# Altium PCB Platine_2_Intel_CPLD.PcbDoc (part 1 of 2)
Units mm, origin at the board's own origin, x right, y up, seen from the top; angles counter-clockwise.
Board outline 159.99 x 100 mm, 2 copper layers (Top Layer, Bottom Layer), stack 1.569 mm thick; 92 components, 117 nets, 463 pads, 99 vias.
Unrouted connection lines stored in the file: 4.
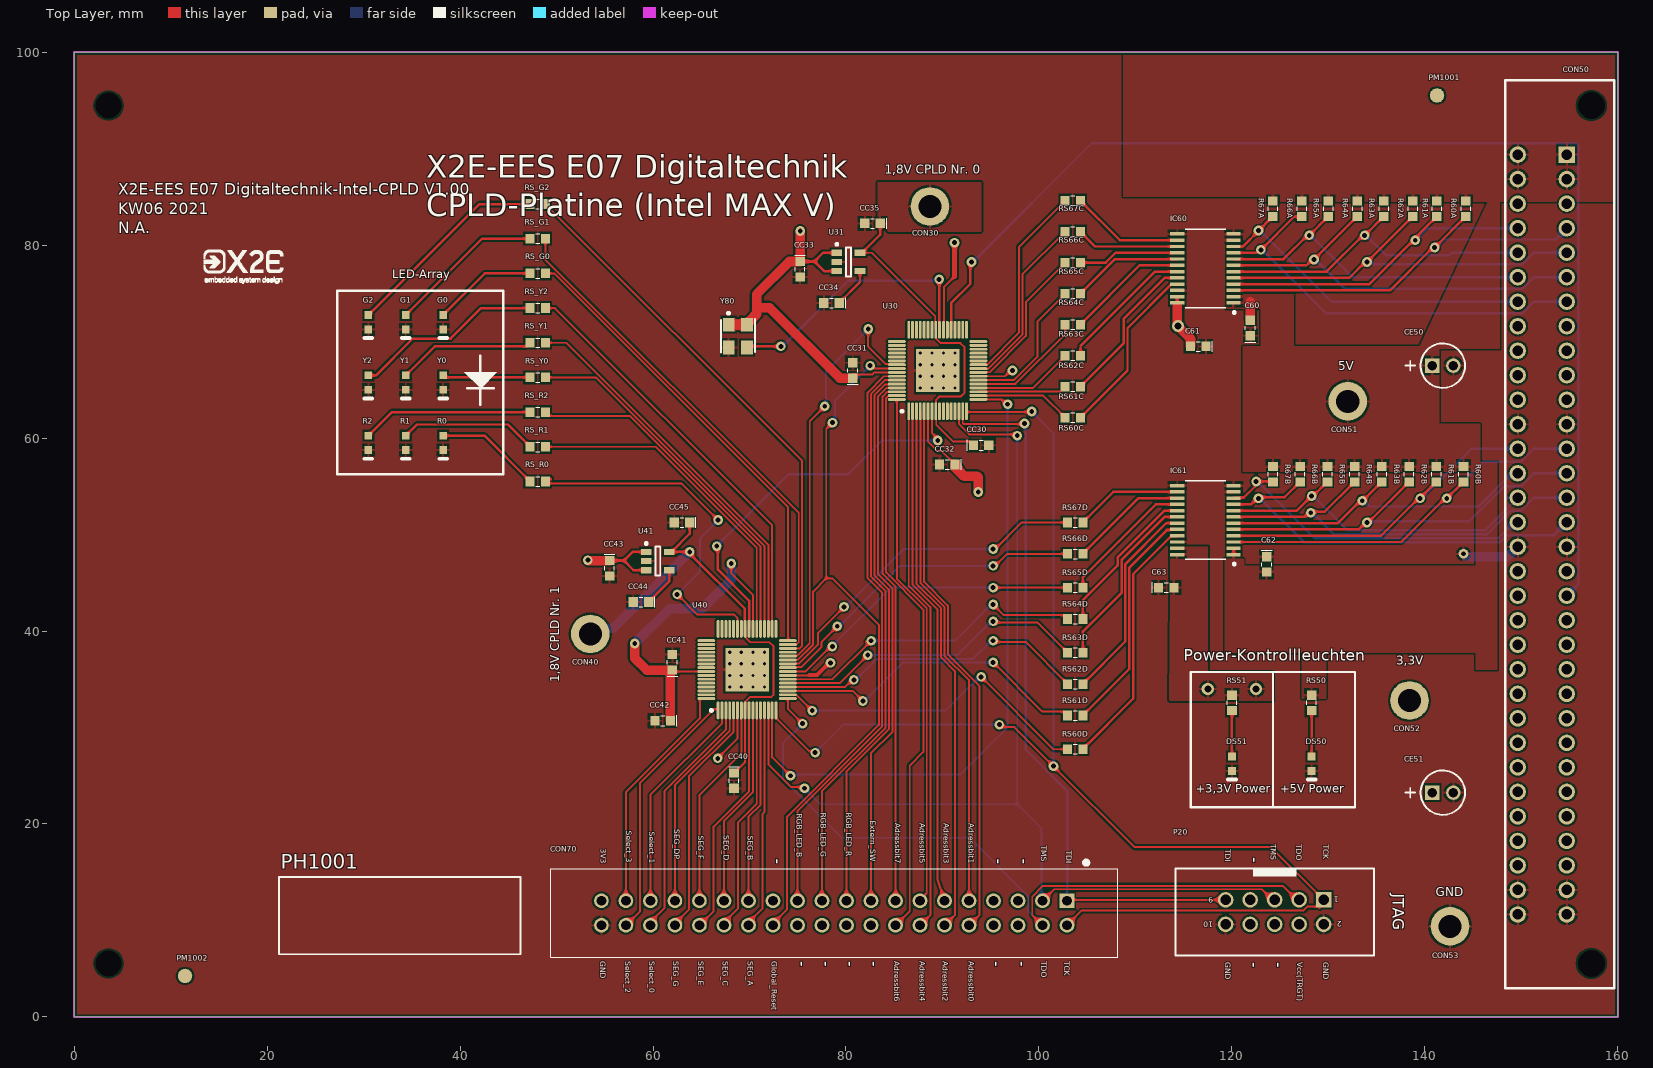
[diagram p0: Top Layer view]
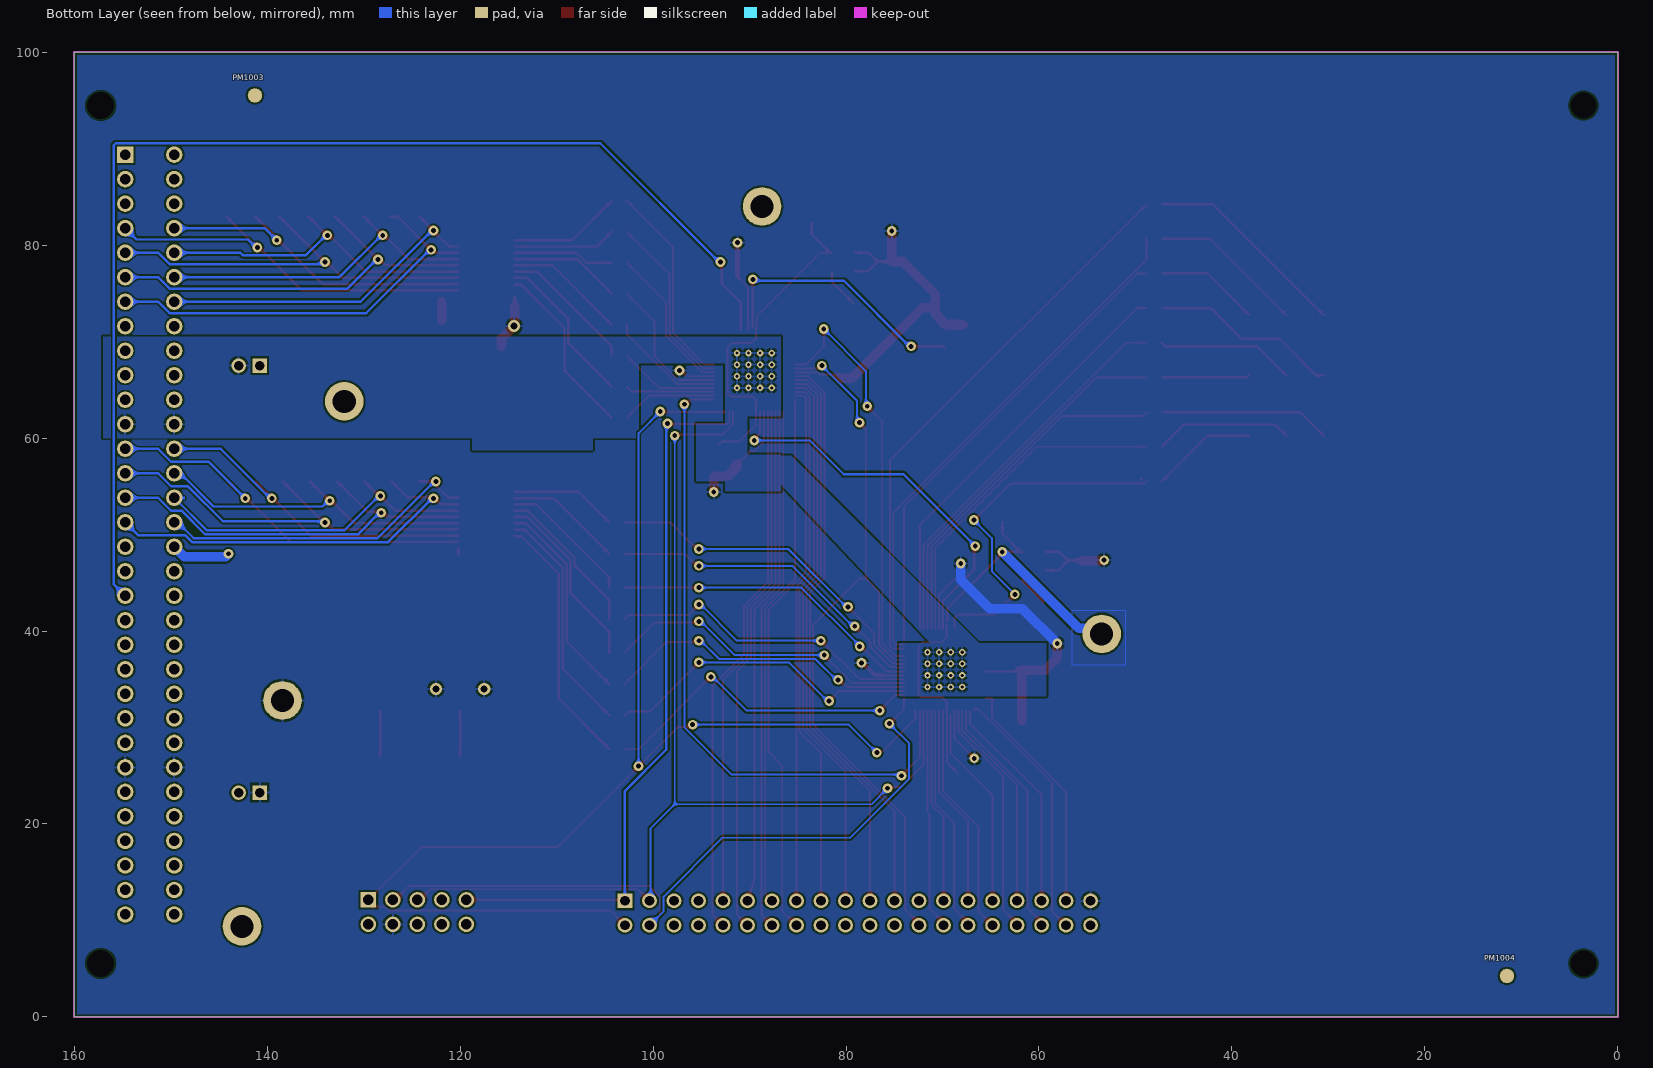
[diagram p1: Bottom Layer view, seen from below]

## Layer stack, top to bottom
Top Solder: solder mask 0.0254, SM-001, Dk 4
Top Layer: signal copper 0.035
Dielectric 1: core 1.4986, Core-043, Dk 4.3
Bottom Layer: signal copper 0.035
Bottom Solder: solder mask 0.0254, SM-001, Dk 4

## Board outline
0,0 159.995,0 159.995,100 0,100

## Design rules (kind name [scope] priority, off if disabled: settings)
Clearance [All] p1: gap=0.2 ignorepadtopadclearanceinfootprint=FALSE except(0: Arc-Hole Track-Hole SMDPad-Hole THPad-Hole Via-Hole Fill-Hole Poly-Hole Region-Hole Text-Hole; 0.1: Arc-SMDPad Track-SMDPad SMDPad-SMDPad; 0.15: Arc-Arc Arc-Track Track-Track)
FabricationTestPointUsage TestPointUsage [All] p1: valid=0 allowmultiple=FALSE
FabricationTestpoint Testpoint [All] p1: side=3 testpointundercomponent=TRUE minsize=1.016 maxsize=2.54 preferedsize=1.524 minholesize=0.508 maxholesize=1.016 preferedholesize=0.813 testpointgrid=0.025 allowsidetop=TRUE allowsidebottom=TRUE usegrid=TRUE gridtolerance=0
PlaneClearance [All] p1: clearance=0.5
PolygonConnect [All] p1: connectstyle=Relief reliefconductorwidth=0.254 reliefentries=4 polygonreliefangle="90 Angle" airgapwidth=0.254
RoomDefinition U_04-Intel_CPLD_1 [InComponentClass('U_04-Intel_CPLD_1')] p1: confinementstyle=ConfineIn formatcopy=TRUE lockcomponents=FALSE outline 53,24.5 76.75,24.5 76.75,54 53,54
RoomDefinition U_03-Intel_CPLD_0 [InComponentClass('U_03-Intel_CPLD_0')] p2: confinementstyle=ConfineIn formatcopy=TRUE lockcomponents=FALSE outline 72.75,55.5 96.5,55.5 96.5,85 72.75,85
RoutingVias [All] p1: holewidth=0.5 width=1 viastyle="Through Hole" minholewidth=0.5 minwidth=1 maxholewidth=0.5 maxwidth=1
SilkToSolderMaskClearance SilkscreenOverComponentPads [IsPad] p1: minsilkscreentomaskgap=0.254 clearancetoexposedcopper=TRUE
SolderMaskExpansion [All] p1: expansion=0.051 istentingtop=FALSE
Width [All] p1: maxlimit=1.5 minlimit=0.2 preferedwidth=0.254 minimp=50.000000 maximp=50.000000 favimp=50.000000
26 further rules are at their usual default settings.

## Classes and differential pairs
net class Data_MCU[7..0]: Data_MCU0 Data_MCU1 Data_MCU2 Data_MCU3 Data_MCU4 Data_MCU5 Data_MCU6 Data_MCU7
net class Data_5V_MCU[7..0]: Data_5V_MCU0 Data_5V_MCU1 Data_5V_MCU2 Data_5V_MCU3 Data_5V_MCU4 Data_5V_MCU5 Data_5V_MCU6 Data_5V_MCU7
net class Address_MCU[7..0]: Address_MCU0 Address_MCU1 Address_MCU2 Address_MCU3 Address_MCU4 Address_MCU5 Address_MCU6 Address_MCU7
net class Address_5V_MCU[7..0]: Address_5V_MCU0 Address_5V_MCU1 Address_5V_MCU2 Address_5V_MCU3 Address_5V_MCU4 Address_5V_MCU5 Address_5V_MCU6 Address_5V_MCU7
component class U_10-Mechanic: PH1001 PM1001 PM1002 PM1003 PM1004
component class U_09-Peripherials: G0 G1 G2 R0 R1 R2 RS_G0 RS_G1 RS_G2 RS_R0 RS_R1 RS_R2 RS_Y0 RS_Y1 RS_Y2 Y0 Y1 Y2
component class U_08-Clock: Y80
component class U_07-FPM_Connector: CON70
component class U_06-LevelShifter: C60 C61 C62 C63 IC60 IC61 R60A R60B R61A R61B R62A R62B R63A R63B R64A R64B R65A R65B R66A R66B R67A R67B RS60C RS60D RS61C RS61D RS62C RS62D RS63C RS63D RS64C RS64D RS65C RS65D RS66C RS66D RS67C RS67D x
component class U_05-Backplane_Connector: CE50 CE51 CON50 CON51 CON52 CON53 DS50 DS51 RS50 RS51
component class U_04-Intel_CPLD_1: CC40 CC41 CC42 CC43 CC44 CC45 CON40 U40 U41
component class U_03-Intel_CPLD_0: CC30 CC31 CC32 CC33 CC34 CC35 CON30 U30 U31
component class U_02-BlockChart: P20

## Components (designator, comment, footprint, x,y, rotation, side; value= is the part's Value field where it differs from the comment)
C60 "CC" 0603_C 121.9,71.4 r270 top
C61 "CC" 0603_C 116.5,69.5 r0 top
C62 "CC" 0603_C 123.6,46.9 r90 top
C63 "CC" 0603_C 113.2,44.5 r180 top
CC30 "CC" 0603_C 94,59.25 r180 top
CC31 "CC" 0603_C 80.7,67 r270 top
CC32 "CC" 0603_C 90.5,57.25 r0 top locked
CC33 "CC" 0603_C 75.25,77.5 r90 top locked
CC34 "CC" 0603_C 78.5,74 r0 top
CC35 "CC" 0603_C 82.75,82.25 r0 top locked
CC40 "CC" 0603_C 68.4,24.5 r90 top
CC41 "CC" 0603_C 62,36.75 r270 top
CC42 "CC" 0603_C 61,30.7 r0 top
CC43 "CC" 0603_C 55.5,46.5 r90 top
CC44 "CC" 0603_C 58.75,43 r0 top
CC45 "CC" 0603_C 63,51.25 r0 top
CE50 "22u0" CE_002_THT_2MM20_S_A 140.75,67.5 r0 top
CE51 "22u0" CE_002_THT_2MM20_S_A 140.75,23.25 r0 top
CON30 "CON_001_M_MM000_S_X_MILL-MAX_TP" CON_001_THT_MM000_S_D 88.7,84 r90 top
CON40 "CON_001_M_MM000_S_X_MILL-MAX_TP" CON_001_THT_MM000_S_D 53.5,39.7 r90 top
CON50 "103-40034" CON_064_THT_2MM54_M 160,50 r90 top locked
CON51 "CON_001_M_MM000_S_X_MILL-MAX_TP" CON_001_THT_MM000_S_D 132,63.8 r90 top
CON52 "CON_001_M_MM000_S_X_MILL-MAX_TP" CON_001_THT_MM000_S_D 138.4,32.8 r90 top
CON53 "CON_001_M_MM000_S_X_MILL-MAX_TP" CON_001_THT_MM000_S_D 142.6,9.4 r90 top
CON70 "CON_040_M_2MM54_S_A" CON_040_THT_2MM54_S_A 78.78,10.77 r180 top locked
DS50 "HSMG-C190" AVAG-HSMX-C190_V 128.25,26.25 r270 top
DS51 "HSMG-C190" AVAG-HSMX-C190_V 120,26.25 r270 top
G0 "HSMG-C190" AVAG-HSMX-C190_V 38.25,72 r270 top
G1 "HSMG-C190" AVAG-HSMX-C190_V 34.375,72 r270 top
G2 "HSMG-C190" AVAG-HSMX-C190_V 30.5,72 r270 top
IC60 "IC_74LVC4245APW118_TSSOP24" TSSOP24 117.25,77.575 r180 top
IC61 "IC_74LVC4245APW118_TSSOP24" TSSOP24 117.25,51.5 r180 top
P20 "CON_010_F_2MM54" CON_010_F_2MM54_Intel_Altera 124.42,10.997 r180 top
PH1001 "PH_25MM00_8MM00" PH_25MM00_8MM00_PCB 46.25,14.5 r180 top
PM1001 "PM_1MM50_MM000" PM_1MM50_PCB 141.25,95.5 r90 top
PM1002 "PM_1MM50_MM000" PM_1MM50_PCB 11.5,4.25 r90 top
PM1003 "PM_1MM50_MM000" PM_1MM50_PCB 141.25,95.5 r90 bottom
PM1004 "PM_1MM50_MM000" PM_1MM50_PCB 11.5,4.25 r90 bottom
R0 "HSMS-C190" AVAG-HSMX-C190_V 38.25,59.5 r270 top
R1 "HSMS-C190" AVAG-HSMX-C190_V 34.375,59.5 r270 top
R2 "HSMS-C190" AVAG-HSMX-C190_V 30.5,59.5 r270 top
R60A "RS" 0603_A 144.24,83.75 r90 top locked
R60B "RS" 0603_A 144,56.25 r90 top locked
R61A "RS" 0603_A 141.24,83.75 r90 top locked
R61B "RS" 0603_A 141.179,56.25 r90 top locked
R62A "RS" 0603_A 138.74,83.75 r90 top locked
R62B "RS" 0603_A 138.357,56.25 r90 top locked
R63A "RS" 0603_A 135.74,83.75 r90 top locked
R63B "RS" 0603_A 135.536,56.25 r90 top locked
R64A "RS" 0603_A 132.99,83.75 r90 top locked
R64B "RS" 0603_A 132.714,56.25 r90 top locked
R65A "RS" 0603_A 129.99,83.75 r90 top locked
R65B "RS" 0603_A 129.893,56.25 r90 top locked
R66A "RS" 0603_A 127.24,83.75 r90 top locked
R66B "RS" 0603_A 127.071,56.25 r90 top locked
R67A "RS" 0603_A 124.24,83.75 r90 top locked
R67B "RS" 0603_A 124.25,56.25 r90 top locked
RS50 "RS" 0603_A 128.25,32.55 r90 top
RS51 "RS" 0603_A 120,32.55 r90 top
RS60C "RS" 0603_A 103.5,62.107 r180 top
RS60D "RS" 0603_A 103.75,27.75 r180 top
RS61C "RS" 0603_A 103.5,65.321 r180 top
RS61D "RS" 0603_A 103.75,31.25 r180 top
RS62C "RS" 0603_A 103.5,68.536 r180 top
RS62D "RS" 0603_A 103.75,34.5 r180 top
RS63C "RS" 0603_A 103.5,71.75 r180 top
RS63D "RS" 0603_A 103.75,37.75 r180 top
RS64C "RS" 0603_A 103.5,74.964 r180 top
RS64D "RS" 0603_A 103.75,41.25 r180 top
RS65C "RS" 0603_A 103.5,78.179 r180 top
RS65D "RS" 0603_A 103.75,44.5 r180 top
RS66C "RS" 0603_A 103.5,81.393 r180 top
RS66D "RS" 0603_A 103.75,48 r180 top
RS67C "RS" 0603_A 103.5,84.607 r180 top
RS67D "RS" 0603_A 103.75,51.25 r180 top
RS_G0 "RS" 0603_A 48.05,77.062 r0 top locked
RS_G1 "RS" 0603_A 48.05,80.656 r0 top locked
RS_G2 "RS" 0603_A 48.05,84.25 r0 top locked
RS_R0 "RS" 0603_A 48.05,55.5 r0 top locked
RS_R1 "RS" 0603_A 48.05,59.094 r0 top locked
RS_R2 "RS" 0603_A 48.05,62.687 r0 top locked
RS_Y0 "RS" 0603_A 48.05,66.281 r0 top locked
RS_Y1 "RS" 0603_A 48.05,69.875 r0 top locked
RS_Y2 "RS" 0603_A 48.05,73.469 r0 top locked
U30 "5M80ZE64I5N" EQFP64_A-120_D2-45_M 89.5,67 r90 top locked
U31 "LP2992AIM5-1.8/NOPB" MF05A_N 80.25,78.25 r0 top locked
U40 "5M80ZE64I5N" EQFP64_A-120_D2-45_M 69.75,36 r90 top
U41 "LP2992AIM5-1.8/NOPB" MF05A_N 60.5,47.25 r0 top
Y0 "HSMY-C190" AVAG-HSMX-C190_V 38.25,65.75 r270 top
Y1 "HSMY-C190" AVAG-HSMX-C190_V 34.375,65.75 r270 top
Y2 "HSMY-C190" AVAG-HSMX-C190_V 30.5,65.75 r270 top
Y80 "ASE-4.000MHZ-LC-T" ASE-4.000MHZ-LC-T_HandSoldering 68.823,70.548 r270 top

## Footprints (in the part's own frame and the unit in brackets; to place one, negate y for a bottom-side part, rotate by r counter-clockwise, add the part's x,y. Pads: shape width x height; smd on the part's side, far side on the other; paste and mask are expansions set on the pad)
0603_A [mm]
  rect 0.95x1 smd mask+0.05: 1(-0.8,0) 2(0.8,0)
  silkscreen extent -0.2,-0.49 0.21,0.49, body extent -0.89,-0.49 0.89,0.49, height 0.45
0603_C [mm]
  rect 0.95x1 smd mask+0.05: 1(-0.8,0) 2(0.8,0)
  silkscreen extent -0.2,-0.55 1.45,0.55, body extent -0.89,-0.49 0.89,0.49, height 0.8
ASE-4.000MHZ-LC-T_HandSoldering [mm]
  rect 1.427x1.227 smd paste+0 mask+0: 1(-1.202,-0.977) 2(1.152,-0.977) 3(1.152,0.927) 4(-1.202,0.927)
  silkscreen extent -2.5,-1.78 1.69,1.72, body extent -1.83,-1.5 1.77,1.45, height 0.25
AVAG-HSMX-C190_V [mm] "SMD, 2-Leads, Body 1.6x0.8mm, Height 0.9mm"
  rect 0.8x0.8 smd: 1(-0.75,0) 2(0.75,0)
  silkscreen extent 1.65,-0.4 1.65,0.4, body extent -0.8,-0.4 0.8,0.4, height 0.9
CE_002_THT_2MM20_S_A [mm]
  rect 1.5x1.5 hole 1: 1(0,0)
  round 1.5 hole 1: 2(2.2,0)
  silkscreen extent -2.78,-2.3 3.4,2.3, body extent -1.4,-2.5 3.6,2.5, height 11
CON_001_THT_MM000_S_D [mm]
  round 4 hole 2.39: 1(0,0)
  body extent -1.58,-1.59 1.59,1.59, height 5.98
CON_010_F_2MM54_Intel_Altera [mm]
  rect 1.6x1.6 hole 1.1: 1(-5.08,-1.143)
  round 1.6 hole 1.1: 2(-5.08,1.397) 3(-2.54,-1.143) 4(-2.54,1.397) 5(0,-1.143) 6(0,1.397) 7(2.54,-1.143) 8(2.54,1.397) 9(5.08,-1.143) 10(5.08,1.397)
  silkscreen extent -10.28,-4.37 10.28,4.63, body extent -10.18,-4.3 10.18,4.88, height 9.13
CON_040_THT_2MM54_S_A [mm] "CONN HEADER VERT 40POS 2.54MM"
  rect 1.53x1.53 hole 1.02: 1(-24.13,-1.27)
  round 1.53 hole 1.02: 2(-24.13,1.27) 3(-21.59,-1.27) 4(-21.59,1.27) 5(-19.05,-1.27) 6(-19.05,1.27) 7(-16.51,-1.27) 8(-16.51,1.27) 9(-13.97,-1.27) 10(-13.97,1.27) 11(-11.43,-1.27) 12(-11.43,1.27) 13(-8.89,-1.27) 14(-8.89,1.27) 15(-6.35,-1.27) 16(-6.35,1.27) 17(-3.81,-1.27) 18(-3.81,1.27) 19(-1.27,-1.27) 20(-1.27,1.27) 21(1.27,-1.27) 22(1.27,1.27) 23(3.81,-1.27) 24(3.81,1.27) 25(6.35,-1.27) 26(6.35,1.27) 27(8.89,-1.27) 28(8.89,1.27) 29(11.43,-1.27) 30(11.43,1.27) 31(13.97,-1.27) 32(13.97,1.27) 33(16.51,-1.27) 34(16.51,1.27) 35(19.05,-1.27) 36(19.05,1.27) 37(21.59,-1.27) 38(21.59,1.27) 39(24.13,-1.27) 40(24.13,1.27)
  silkscreen extent -29.4,-5.52 29.4,4.6, body extent -29.23,-4.4 29.23,4.65, height 8.85
CON_064_THT_2MM54_M [mm]
  oval 0x1.524 hole 2.8 unplated paste+0 mask+0: 34(44.45,2.76) 35(-44.45,2.76)
  rect 1.7x1.7 hole 1.1: A1(39.37,5.3)
  round 1.7 hole 1.1: A2(36.83,5.3) A3(34.29,5.3) A4(31.75,5.3) A5(29.21,5.3) A6(26.67,5.3) A7(24.13,5.3) A8(21.59,5.3) A9(19.05,5.3) A10(16.51,5.3) A11(13.97,5.3) A12(11.43,5.3) A13(8.89,5.3) A14(6.35,5.3) A15(3.81,5.3) A16(1.27,5.3) A17(-1.27,5.3) A18(-3.81,5.3) A19(-6.35,5.3) A20(-8.89,5.3) A21(-11.43,5.3) A22(-13.97,5.3) A23(-16.51,5.3) A24(-19.05,5.3) A25(-21.59,5.3) A26(-24.13,5.3) A27(-26.67,5.3) A28(-29.21,5.3) A29(-31.75,5.3) A30(-34.29,5.3) A31(-36.83,5.3) A32(-39.37,5.3) C1(39.37,10.38) C2(36.83,10.38) C3(34.29,10.38) C4(31.75,10.38) C5(29.21,10.38) C6(26.67,10.38) C7(24.13,10.38) C8(21.59,10.38) C9(19.05,10.38) C10(16.51,10.38) C11(13.97,10.38) C12(11.43,10.38) C13(8.89,10.38) C14(6.35,10.38) C15(3.81,10.38) C16(1.27,10.38) C17(-1.27,10.38) C18(-3.81,10.38) C19(-6.35,10.38) C20(-8.89,10.38) C21(-11.43,10.38) C22(-13.97,10.38) C23(-16.51,10.38) C24(-19.05,10.38) C25(-21.59,10.38) C26(-24.13,10.38) C27(-26.67,10.38) C28(-29.21,10.38) C29(-31.75,10.38) C30(-34.29,10.38) C31(-36.83,10.38) C32(-39.37,10.38)
  body extent -47,-7.34 47,10.69, height 5.45
EQFP64_A-120_D2-45_M [mm] "Thin QFP, 64-Leads, Body 7x7mm, Pitch 0.4mm, Thermal Pad, IPC Low Density"
  oval 1.85x0.3 smd: 1(-4.225,3) 2(-4.225,2.6) 3(-4.225,2.2) 4(-4.225,1.8) 5(-4.225,1.4) 6(-4.225,1) 7(-4.225,0.6) 8(-4.225,0.2) 9(-4.225,-0.2) 10(-4.225,-0.6) 11(-4.225,-1) 12(-4.225,-1.4) 13(-4.225,-1.8) 14(-4.225,-2.2) 15(-4.225,-2.6) 16(-4.225,-3) 33(4.225,-3) 34(4.225,-2.6) 35(4.225,-2.2) 36(4.225,-1.8) 37(4.225,-1.4) 38(4.225,-1) 39(4.225,-0.6) 40(4.225,-0.2) 41(4.225,0.2) 42(4.225,0.6) 43(4.225,1) 44(4.225,1.4) 45(4.225,1.8) 46(4.225,2.2) 47(4.225,2.6) 48(4.225,3)
  oval 0.3x1.85 smd: 17(-3,-4.225) 18(-2.6,-4.225) 19(-2.2,-4.225) 20(-1.8,-4.225) 21(-1.4,-4.225) 22(-1,-4.225) 23(-0.6,-4.225) 24(-0.2,-4.225) 25(0.2,-4.225) 26(0.6,-4.225) 27(1,-4.225) 28(1.4,-4.225) 29(1.8,-4.225) 30(2.2,-4.225) 31(2.6,-4.225) 32(3,-4.225) 49(3,4.225) 50(2.6,4.225) 51(2.2,4.225) 52(1.8,4.225) 53(1.4,4.225) 54(1,4.225) 55(0.6,4.225) 56(0.2,4.225) 57(-0.2,4.225) 58(-0.6,4.225) 59(-1,4.225) 60(-1.4,4.225) 61(-1.8,4.225) 62(-2.2,4.225) 63(-2.6,4.225) 64(-3,4.225)
  rect 4.5x4.5 smd: 65(0,0)
  silkscreen extent -4.35,3.57 -4.1,3.82, body extent -3.5,-3.5 3.5,3.5, height 1.2
MF05A_N [mm] "SOT23, 5-Leads, Body 2.9x1.6mm, Pitch 0.95mm, Lead Span 2.8mm, IPC Medium Density"
  rect 1.1x0.65 smd: 1(-1.2,0.95) 2(-1.2,0) 3(-1.2,-0.95) 4(1.2,-0.95) 5(1.2,0.95)
  silkscreen extent -1.32,-1.5 0.25,1.95, body extent -0.83,-1.49 0.83,1.5, height 1.19
PH_25MM00_8MM00_PCB [mm]
  silkscreen extent 0,0 25,8
PM_1MM50_PCB [mm]
  round 1.5 smd mask+0.1: 1(0,0)
TSSOP24 [mm] "Level Shifter"
  rect 1.462x0.355 smd paste+0 mask+0: 1(-2.921,3.575) 2(-2.921,2.925) 3(-2.921,2.275) 4(-2.921,1.625) 5(-2.921,0.975) 6(-2.921,0.325) 7(-2.921,-0.325) 8(-2.921,-0.975) 9(-2.921,-1.625) 10(-2.921,-2.275) 11(-2.921,-2.925) 12(-2.921,-3.575) 13(2.921,-3.575) 14(2.921,-2.925) 15(2.921,-2.275) 16(2.921,-1.625) 17(2.921,-0.975) 18(2.921,-0.325) 19(2.921,0.325) 20(2.921,0.975) 21(2.921,1.625) 22(2.921,2.275) 23(2.921,2.925) 24(2.921,3.575)
  silkscreen extent -3.11,-4.08 2.12,4.7, body extent -3.3,-3.95 3.3,3.95, height 1.09

## Part data
C60 C61 C62 C63: library part X_00004988, capacitance=100N, manufacturer=Kemet, max_operating_temp=125C, min_operating_temp=-55C, package=0603, temp_coefficient=X7R, tolerance=10P0, voltage_rated=50V0, entity_name=CC_0603_100N_50V0_10P0_X7R_Kemet, entity_type_name=capacitor_ceramic, height=mm800, length=1mm60, ordering_information_btm=801-5347, production_status=Aktiv, release=blocked, series=none, used_in_bom=0, width=mm800, x2e_number=X_00004988
CC30 CC31 CC32 CC40 CC41 CC42: library part X_00000681, capacitance=100N, manufacturer=Yageo, max_operating_temp=125C, min_operating_temp=-55C, package=0603, temp_coefficient=X7R, tolerance=10P0, voltage_rated=50V0, entity_name=CC_0603_100N_50V0_10P0_X7R, entity_type_name=capacitor_ceramic, height=mm900, length=1mm60, ordering_information_btm=311-1344-6-ND, production_status=Aktiv, release=blocked, series=none, used_in_bom=1, width=mm800, x2e_number=X_00000681
CC33 CC43: library part X_00001611, capacitance=1U00, manufacturer="Taiyo Yuden", max_operating_temp=125C, min_operating_temp=-55C, package=0603, temp_coefficient=X7R, tolerance=10P0, voltage_rated=50V0, entity_name=CC_0603_1U00_50V0_10P0_X7R, entity_type_name=capacitor_ceramic, height=mm800, length=1mm60, ordering_information_btm=587-3247-6-ND, production_status=Aktiv, release=blocked, series=M, used_in_bom=1, width=mm800, x2e_number=X_00001611
CC34 CC44: library part X_00000431, capacitance=10N0, manufacturer=Kemet, max_operating_temp=125C, min_operating_temp=-55C, package=0603, temp_coefficient=X7R, tolerance=10P0, voltage_rated=50V0, entity_name=CC_0603_10N0_50V0_10P0_X7R, entity_type_name=capacitor_ceramic, height=mm800, length=1mm60, ordering_information_btm=399-1091-6-ND, production_status=Aktiv, release=blocked, series=none, used_in_bom=1, width=mm800, x2e_number=X_00000431
CC35 CC45: library part X_00002029, capacitance=4U70, manufacturer=Samsung, max_operating_temp=125C, min_operating_temp=-55C, package=0603, temp_coefficient=X7R, tolerance=10P0, voltage_rated=6V30, entity_name=CC_0603_4U70_6V30_10P0_X7R, entity_type_name=capacitor_ceramic, height=mm800, length=1mm60, ordering_information_btm=1276-2087-6-ND, production_status=Aktiv, release=blocked, series=CL, used_in_bom=1, width=mm800, x2e_number=X_00002029
CE50 CE51: library part CE_RADIAL_22U_50V0_20PO_R07, "Teapo Elko TA Series 22µF 50V"
CON30 CON40 CON51 CON52 CON53: library part X_00001838, "MILL-MAX_TP", manufacturer=MILL-MAX, max_operating_temp=0C, package=THT, editor_date="boos, 06.02.2014", entity_name=CON_001_M_MM000_S_X_MILL-MAX_TP, entity_type_name=connector, gender=M, grid=MM000, height=5mm56, length=3mm18, min_operating_temp=0C, mounting_type=S, number_of_electronic_pins=001, ordering_information="digikey, ED90581-ND", ordering_information_btm=ED90581-ND, pin_count_type=X, production_status=Aktiv, release=blocked, series=2501, shell_material=Tin, used_in_bom=1, width=3mm18, x2e_number=X_00001838
CON50: library part CON_064_M_2MM54_L_X, "C- Male Connector According to IEC 60603-2 (DIN 41612)", editor_date=li_08.12.2020
CON70: library part X_00006869, "Connector Header Through Hole 40 position 2.54mm", manufacturer="On Shore Technology Inc.", manufacturer_partnumber=302-S401, max_operating_temp=105C, min_operating_temp=-40C, package=THT, editor_date=niemiec_14.05.2020, entity_name="CON_040_M_2MM54_S_A_CON HEADER 40 POS", entity_type_name=connector, features="Connector Header Through Hole 40 position 0.100\" (2.54mm)", gender=M, grid=2MM54, height=8mm80, length=58mm4, mounting_type=S, number_of_electronic_pins=040, ordering_information_btm=ED10529-ND, Parameter 3="Digi-Key ED10529-ND", pin_count_type=A, production_status=Aktiv, release=blocked, series=302, shell_material="Polyester, Glass Filled", used_in_bom=0, width=9mm05, x2e_number=X_00006869
DS50 DS51 G0 G1 G2: library part CMP-1744-00002-1, "Chip LED, Green, 2.2 V, -40 to 85 degC, 2-Pin SMD, RoHS, Tape and Reel", Case\Package=SOIC, Clock Frequency="100 KHz", Frequency="400 KHz", Max Operating Temperature="85 degC", Max Supply Voltage="5.5 V", Min Operating Temperature="-40 degC", Min Supply Voltage="1.7 V", Nominal Supply Current="2 mA", Package Quantity=3000, Access Time="3500 ns", ComponentLink1Description="Manufacturer URL", ComponentLink1URL=http://www.avagotech.com/, ComponentLink2Description=Datasheet, ComponentLink2URL=http://docs.avagotech.com/docs/AV02-0551EN, ComponentLink3Description="Package Specification", ComponentLink3URL=http://www.fairchildsemi.com/dwg/MA/MA03D.pdf, DatasheetVersion=Mar-12, Density="32 kb", height="1.5 mm", Interface=Serial, length="5 mm", Max Clock Frequency="100 KHz", mount="Surface Mount", PackageDescription="2-Pin Surface Mount Device, Body 1.6 x 0.8 mm, Height 0.9 mm", PackageReference=HSMX-C190, Packaging="Tape and Reel", Pins=8, Radiation Hardening=No, REACH SVHC="No SVHC", RoHSCompliant=true, width="4 mm"
IC60 IC61: "ic, logic, bus switch, level shifter", manufacture_name=IDTQS3384QG8, manufacturer=IDT, max_operating_temp=85C, min_operating_temp=-40C, package=SSOP24, data_rate=bps000, entity_name=74LVC4245APW,118, entity_type_name=levelshifter, height=1mm73, input_type=logic, length=8mm89, number_of_bits=010, number_of_channels=001, ordering_information="digikey, 800-1739-1-ND", ordering_information_btm=800-1739-2-ND, output_type=logic, production_status=Aktiv, propagation_delay=250P, release=blocked, revision=none, series=none, used_in_bom=1, vcc_max=5V25, vcc_min=4V75, width=3mm90, x2e_number=X_00000794
P20: "Male Box Header WR-BHD, THT, Vertical, pitch 2.54 mm, 10 pins"
PH1001: "Tag", dimension_a=25MM0, dimension_b=8MM00, editor_date=lavan,23.01.2013, footprint_path=Y:\lib\pads_stable, footprint_ref=PH_25MM00_8MM00_PCB, library_path=Y:\lib\pads_stable\mechanic, library_ref=PH_25MM00_8MM00
PM1001 PM1002 PM1003 PM1004: "passer mark", dimension_a=1MM50, dimension_b=MM000, editor_date=lavan,14.01.2013, footprint_path=Y:\lib\pads_stable, footprint_ref=PM_1MM50_PCB, library_path=Y:\lib\pads_stable\mechanic, library_ref=PM_1MM50_MM000
R0 R1 R2: library part CMP-2000-06427-1, "LED Uni-Color Red, 52 mW, 20 mA, -40 to 85 degC, 2-Pin SMD, RoHS, Tape and Reel", Emitting Color=Red, Forward Current=25mA, Forward Voltage=2.6V, manufacturer=Avago, Operating Temp Range=-40Cto85C, Operating Temperature Classification=Industrial, Package Description="2-Pin Surface Mount Device, Body 1.6 x 0.8 mm, Height 0.9 mm", Package Reference=HSMX-C190, Package Type=ChipLed, Power Dissipation=52W, Reverse Voltage=5V, Test Current (It)=20mA, Chip Material=GaP, Datasheet URL=http://docs.avagotech.com/docs/AV02-0551EN, Datasheet Version=03/2012, DELETED=Compliant, Dominant Wave Length=626nm, High Brightness=No, Lens Dimensions=1x0.8x0.5mm, Lens Type=ColorlessDiffused, Lum Intensity=10mcd, Luminous Intensity=10mcd, Main Category=ChipLED, Manufacturer URL=http://www.avagotech.com/, Mounting=SurfaceMount, Mounting Technology=SurfaceMount, Number of  Elements=1, Packaging=TapeandReel, Peak Wavelength=630nm, Pin Count=2, Product Depth (mm)=0.8mm, Product Height (mm)=0.8mm, Product Length (mm)=1.6mm, Rad Hardened=No, Shape Type=Rectangular, Type=Uni-Color, Viewing Angle=170deg
R60A R60B R61A R61B R62A R62B R63A R63B R64A R64B R65A R65B R66A R66B R67A R67B: library part X_00000001, manufacturer=Yageo, max_operating_temp=125C, min_operating_temp=-55C, package=0603, power=W100, resistance=10K0, temp_coefficient=100PPM, tolerance=1P00, entity_name=RS_0603_10K0_W100_1P00_100PPM, entity_type_name=resistor_standard, height=mm450, length=1mm60, ordering_information_btm=311-10.0KHRCT-ND, production_status=Aktiv, release=blocked, series=RC0603, used_in_bom=1, width=mm800, x2e_number=X_00000001
RS50: library part X_00000390, manufacturer=Yageo, max_operating_temp=125C, min_operating_temp=-55C, package=0603, power=W100, resistance=1K15, temp_coefficient=100PPM, tolerance=1P00, entity_name=RS_0603_1K15_W100_1P00_100PPM, entity_type_name=resistor_standard, height=mm450, length=1mm60, ordering_information_btm=541-1.15KHCT-ND, production_status=Aktiv, release=blocked, series=RC0603, used_in_bom=1, width=mm800, x2e_number=X_00000390
RS51 RS_G0 RS_G1 RS_G2 RS_R0 RS_R1 RS_R2 RS_Y0 RS_Y1 RS_Y2: library part X_00000061, manufacturer=Yageo, max_operating_temp=125C, min_operating_temp=-55C, package=0603, power=W100, resistance=470R, temp_coefficient=100PPM, tolerance=1P00, entity_name=RS_0603_470R_W100_1P00_100PPM, entity_type_name=resistor_standard, height=mm450, length=1mm60, ordering_information_btm=311-470HRDKR-ND, production_status=Aktiv, release=blocked, series=RC0603, used_in_bom=1, width=mm800, x2e_number=X_00000061
RS60C RS60D RS61C RS61D RS62C RS62D RS63C RS63D RS64C RS64D RS65C RS65D RS66C RS66D RS67C RS67D: library part X_00000034, manufacturer=Yageo, max_operating_temp=125C, min_operating_temp=-55C, package=0603, power=W100, resistance=1K00, temp_coefficient=100PPM, tolerance=1P00, entity_name=RS_0603_1K00_W100_1P00_100PPM, entity_type_name=resistor_standard, height=mm450, length=1mm60, ordering_information_btm=504-8928, production_status=Aktiv, release=blocked, series=RC0603, used_in_bom=1, width=mm800, x2e_number=X_00000034
U30 U40: library part CMP-0217-00123-1, "MAX V 1.8V CPLD, 54 IOs, 80 Logic Elements, 64-Pin EQFP, Industrial Temperature, Speed Grade 5, Pb-Free", Code_JEDEC=MS-026-ABD-HD, ComponentLink1Description="Manufacturer URL", ComponentLink1URL=http://www.altera.com/, ComponentLink2Description=Datasheet, ComponentLink2URL=http://www.altera.com/literature/hb/max-v/max5_handbook.pdf, ComponentLink3Description="MAX V Device Pin-Out files", ComponentLink3URL=http://www.altera.com/literature/lit-dp.jsp?category=MAX%205&showspreadsheet=y, ComponentLink4Description="Package Specification", ComponentLink4URL=http://www.altera.com/devicepackaging/04R00384-01.pdf, DatasheetVersion="ver1.2, May-2011", PackageDescription="64-Pin Plastic Enhanced Quad Flat (EQFP) - Wire Bond - A:1.20 - D2:4.5", PackageReference=EQFP64_A-120_D2-45, PackageVersion="ver1.0, Jul-2011"
U31 U41: library part CMP-0062-02117-2, "Micropower 250 mA Low-Noise Ultra Low-Dropout Regulator, 5-pin SOT-23, Pb-Free", manufacturer="National Semiconductor", PackageTopMarking=LFCA*XTT, PowerWise=N, ComponentLink1Description="LP2992 Datasheet", ComponentLink1URL=http://www.national.com/ds/LP/LP2992.pdf, ComponentLink2Description="LP2992 Web Page", ComponentLink2URL=http://www.national.com/pf/LP/LP2992.html, ComponentLink3Description="MF05A Package Page", ComponentLink3URL=http://www.national.com/packaging/folders/mf05a.html, CompType="LDO IC", DatasheetVersion=May-2005, PackageDescription="Molded SOT-23, .115 x .063 x .040 in Body, 5 Lead, .0375 in Pitch", PackageReference=MF05A, PackageVersion="revD, Aug-2008", PinCount=5, RevisionNote="Component URLs added", RoHS=Y
Y0 Y1 Y2: library part CMP-1744-00003-1, "LED Uni-Color Yellow, 65 mW, 20 mA, -40 to 85 degC, 2-Pin SMD, RoHS, Tape and Reel", Case Code (Imperial)=0603, Case Code (Metric)=1608, Max Operating Temperature="155 degC", Min Operating Temperature="-55 degC", Package Quantity=5000, Power Rating="100 mW", resistance="390 Ohm", tolerance=1%, Voltage Rating="50 V", Case\Package=0603, ComponentLink1Description="Manufacturer URL", ComponentLink1URL=http://www.avagotech.com/, ComponentLink2Description=Datasheet, ComponentLink2URL=http://docs.avagotech.com/docs/AV02-0551EN, ComponentLink3Description="Package Specification", ComponentLink3URL=http://www.fairchildsemi.com/dwg/MA/MA03D.pdf, DatasheetVersion=Mar-12, height="0.45 mm", length="1.6 mm", mount="Surface Mount", PackageDescription="2-Pin Surface Mount Device, Body 1.6 x 0.8 mm, Height 0.9 mm", PackageReference=HSMX-C190, Packaging="Tape and Reel", Pins=2, REACH SVHC="No SVHC", RoHSCompliant=true, Voltage Rating (DC)="50 V", width="0.8 mm"
Y80: library part OC_SMD_4MHz_3V3_ASE, "XTAL OSC XO 4.0000MHZ CMOS SMD", ComponentLink1Description=Datasheet, ComponentLink1URL=https://abracon.com/Oscillators/ASEseries.pdf

## Free pads (board coordinates)
  round 1.27 hole 2.7 unplated: 1(3.57,94.45) 2(3.57,5.55)

## Via types
v1: diameter 1, hole 0.5, Top Layer to Bottom Layer, 64 vias
v2: diameter 0.66, hole 0.33, Top Layer to Bottom Layer, tented top, 32 vias
v3: diameter 1.27, hole 0.711, Top Layer to Bottom Layer, 3 vias

## Nets (pads, with @x,y where several pads share a name; then routed paths per layer and width w, separated by ;. In a path a pad name is that pad's centre, name@x,y a point inside that pad or via, vN(x,y) a via of type N, cw(c..) or ccw(c..) an arc to the next point about the centre after c; other vN are vias at no path point)
3V3: C61.1 C63.1 CC31.2 CC32.2 CC33.2 CC41.2 CC42.2 CC43.2 CE51.1 CON50.A26 CON50.C26 CON52.1 CON70.39 IC60.23 IC60.24 IC61.23 IC61.24 P20.4 RS51.2 U30.6 U30.23 U30.39 U30.57 U31.1 U31.3 U40.6 U40.23 U40.39 U40.57 U41.1 U41.3 Y80.1 Y80.4 | length 126.4
  Top Layer w0.2: CC41.2 62.15,35.8 U40.57 ; v1(66.7,26.8) 68.75,28.85 U40.6 ; v1(68.1,47) 68.1,46 70.35,43.75 U40.39 ; U40.23 76.136,35.4 76.193,35.457 ; CC31.2 81.075,66.575 82.706,66.575 82.931,66.8 U30.57 ; U30.6 88.5,59.619 89.484,58.634 89.941,58.634 91.3,57.275 CC32.2 ; U30.39 90.119,71.244 90.119,72.046 90.15,72.077 90.15,75.65 91.25,76.75 ; U30.23 96.456,66.4 97.056,67 v1(97.25,67)
  Top Layer w0.254: CC43.2 56.974,47.3 ; U41.3 57.974,46.3 56.974,47.3 ; U41.1 57.874,48.2 56.974,47.3 ; CC33.2 76.724,78.3 ; U31.3 77.724,77.3 76.724,78.3 ; U31.1 77.624,79.2 76.724,78.3 ; IC60.24 IC60.23
  Top Layer w0.4: 76.193,35.457 77.01,35.457 78.253,36.7 v1(78.4,36.7)
  Top Layer w0.5: 91.25,76.75 v1(91.25,80.25)
  Top Layer w1: v1(53.25,47.35) 53.3,47.3 CC43.2 ; v1(58.1,38.7) 58.1,37.2 59.35,35.95 CC41.2 61.8,35.75 CC42.2 ; Y80.1 Y80.4 69.863,71.863 69.863,71.963 70.75,72.85 70.75,73.5 ; v1(75.25,81.45) CC33.2 74.136,78.3 70.75,74.914 70.75,73.5 ; CC31.2 79.375,66.2 72.075,73.5 70.75,73.5 ; CC32.2 91.3,56.987 92.237,56.05 93.579,56.05 93.7,55.929 v1(93.7,54.4) ; 114.329,73.677 114.329,71.677 115.7,70.306 C61.1
  Bottom Layer w1: v1(58.1,38.7) 61.7,42.3 65.1,42.3 68.1,45.3 v1(68.1,47)
  other v3: 117.5,34 122.5,34 114.4,71.6
5V0: C60.1 C62.1 CE50.1 CON50.A1 CON50.A2 CON50.C1 CON50.C2 CON51.1 IC60.1 IC60.2 IC61.1 IC61.2 R60A.2 R60B.2 R61A.2 R61B.2 R62A.2 R62B.2 R63A.2 R63B.2 R64A.2 R64B.2 R65A.2 R65B.2 R66A.2 R66B.2 R67A.2 R67B.2 RS50.2 | length 2.5
  Top Layer w0.254: IC61.1 IC61.2
  Top Layer w1: C60.1 121.9,74.1
A8: CON50.A8
A9: CON50.C8
A10: CON50.A9
A11: CON50.C9
A12: CON50.A10
A13: CON50.C10
A14: CON50.A11
A15: CON50.C11
Address_5V_MCU0: CON50.A4 IC60.3 R60A.1 | length 41.8
  Top Layer w0.254: IC60.3 136.36,75.3 140.81,79.75 v1(141,79.75) 141.015,79.75 144.215,82.95 R60A.1
  Bottom Layer w0.254: v1(141,79.75) 141.169,79.75 141.992,80.573 153.523,80.573 CON50.A4
Address_5V_MCU1: CON50.C4 IC60.4 R61A.1 | length 35.1
  Top Layer w0.254: IC60.4 134.248,75.95 138.882,80.584 138.882,80.618 141.215,82.95 R61A.1
  Bottom Layer w0.254: v1(139,80.5) 140.25,81.75 CON50.C4
Address_5V_MCU2: CON50.A5 IC60.5 R62A.1 | length 42.5
  Top Layer w0.254: IC60.5 132.16,76.6 133.802,78.243 134.008,78.243 138.715,82.95 R62A.1
  Bottom Layer w0.254: v1(134,78.25) 134.202,78.25 134.419,78.033 150.108,78.033 151.285,79.21 CON50.A5
Address_5V_MCU3: CON50.C5 IC60.6 R63A.1 | length 34.8
  Top Layer w0.254: IC60.6 129.81,77.25 133.552,80.992 133.758,80.992 135.715,82.95 R63A.1
  Bottom Layer w0.254: v1(133.75,81) 133.919,81 135.996,78.923 142.485,78.923 142.772,79.21 CON50.C5
Address_5V_MCU4: CON50.A6 IC60.7 R64A.1 | length 42.8
  Top Layer w0.254: IC60.7 127.71,77.9 128.302,78.492 128.508,78.492 132.965,82.95 R64A.1
  Bottom Layer w0.254: v1(128.5,78.5) 128.669,78.5 131.676,75.493 150.108,75.493 151.285,76.67 CON50.A6
Address_5V_MCU5: CON50.C6 IC60.8 R65A.1 | length 35.1
  Top Layer w0.254: IC60.8 125.36,78.55 127.802,80.992 128.008,80.992 129.965,82.95 R65A.1
  Bottom Layer w0.254: v1(128,81) 128.169,81 132.499,76.67 CON50.C6
Address_5V_MCU6: CON50.A7 IC60.9 R66A.1 | length 43.5
  Top Layer w0.254: IC60.9 122.498,79.2 122.798,79.5 v1(123,79.5) 126.45,82.95 R66A.1
  Bottom Layer w0.254: v1(123,79.5) 123.169,79.5 129.716,72.953 150.108,72.953 151.285,74.13 CON50.A7
Address_5V_MCU7: CON50.C7 IC60.10 R67A.1 | length 35.3
  Top Layer w0.254: IC60.10 121.14,79.85 122.77,81.48 123.44,82.15 123.44,82.175 124.215,82.95 R67A.1
  Bottom Layer w0.254: v1(122.75,81.5) 122.919,81.5 130.289,74.13 CON50.C7
Address_MCU0: RS60C.2 U30.18 | length 9.9
  Top Layer w0.2: U30.18 100.432,64.4 102.7,62.132 RS60C.2
Address_MCU1: RS61C.2 U30.19 | length 9.2
  Top Layer w0.2: U30.19 102.204,64.8 102.7,65.296 RS61C.2
Address_MCU2: RS62C.2 U30.20 | length 10.4
  Top Layer w0.2: U30.20 99.389,65.2 102.7,68.511 RS62C.2
Address_MCU3: RS63C.2 U30.21 | length 12.1
  Top Layer w0.2: U30.21 97.547,65.6 102.7,70.753 RS63C.2
Address_MCU4: RS64C.2 U30.22 | length 14.8
  Top Layer w0.2: U30.22 97.381,66 99.853,68.472 99.853,72.092 102.7,74.939 RS64C.2
Address_MCU5: RS65C.2 U30.24 | length 15.8
  Top Layer w0.2: U30.24 93.744,66.819 94.875,66.819 98.635,70.58 98.635,74.089 102.7,78.154 RS65C.2
Address_MCU6: RS66C.2 U30.25 | length 18.5
  Top Layer w0.2: U30.25 93.744,67.219 94.78,67.219 98.285,70.725 98.285,76.953 102.7,81.368 RS66C.2
Address_MCU7: RS67C.2 U30.26 | length 21.2
  Top Layer w0.2: U30.26 93.744,67.619 94.614,67.619 97.935,70.94 97.935,79.817 102.7,84.582 RS67C.2
CLK_CPLD0: U30.40 Y80.3 | length 27.8
  Top Layer w0.254: Y80.3 69.854,69.5 v1(73.25,69.5) ; v1(89.649,76.443) 89.677,76.415 U30.40@89.677,71.5
  Bottom Layer w0.254: v1(73.25,69.5) 73.419,69.5 80.221,76.302 89.508,76.302 v1(89.649,76.443)
CLK_CPLD1: U30.7 U40.40 | length 40.7
  Top Layer w0.2: U30.7 88.9,60.544 89.5,59.944 v1(89.5,59.75)
  Top Layer w0.254: v1(66.6,48.8) 66.72,48.68 66.72,46.365 69.95,43.135 U40.40
  Bottom Layer w0.2: 80.25,56.25 83.75,59.75 v1(89.5,59.75)
  Bottom Layer w0.254: v1(66.6,48.8) 74.05,56.25 80.25,56.25
Data_5V_MCU0: CON50.A13 IC61.3 R60B.1 | length 41
  Top Layer w0.254: IC61.3 137.544,49.225 142.057,53.738 142.262,53.738 143.975,55.45 R60B.1
  Bottom Layer w0.254: v1(142.25,53.75) 146.027,57.527 149.922,57.527 151.285,58.89 CON50.A13
Data_5V_MCU1: CON50.C13 IC61.4 R61B.1 | length 35.6
  Top Layer w0.254: IC61.4 135.456,49.875 139.354,53.773 139.477,53.773 141.154,55.45 R61B.1
  Bottom Layer w0.254: v1(139.5,53.75) 139.669,53.75 144.809,58.89 CON50.C13
Data_5V_MCU2: CON50.A14 IC61.5 R62B.1 | length 43
  Top Layer w0.254: IC61.5 133.124,50.525 133.783,51.184 134.066,51.184 138.332,55.45 R62B.1
  Bottom Layer w0.254: v1(134,51.25) 134.12,51.37 144.575,51.37 148.193,54.987 149.922,54.987 151.285,56.35 CON50.A14
Data_5V_MCU3: CON50.C14 IC61.6 R63B.1 | length 34.9
  Top Layer w0.254: IC61.6 130.98,51.175 133.274,53.47 133.53,53.47 135.511,55.45 R63B.1
  Bottom Layer w0.254: v1(133.5,53.5) 133.669,53.5 134.265,52.905 145.539,52.905 148.984,56.35 CON50.C14
Data_5V_MCU4: CON50.A15 IC61.7 R64B.1 | length 43.1
  Top Layer w0.254: IC61.7 127.522,51.825 127.962,52.265 v1(128.164,52.265) 128.281,52.382 129.621,52.382 132.689,55.45 R64B.1
  Bottom Layer w0.254: v1(128.164,52.265) 128.333,52.265 130.579,50.019 146.4,50.019 148.828,52.447 149.922,52.447 151.285,53.81 CON50.A15
Data_5V_MCU5: CON50.C15 IC61.8 R65B.1 | length 35.2
  Top Layer w0.254: IC61.8 126.725,52.475 v1(128.25,54) ; v1@128.334,53.916 129.868,55.45 R65B.1
  Bottom Layer w0.254: v1(128.25,54) 128.419,54 131.996,50.423 146.233,50.423 CON50.C15
Data_5V_MCU6: CON50.A16 IC61.9 R66B.1 | length 42.5
  Top Layer w0.254: IC61.9 121.962,53.125 122.587,53.75 v1(122.75,53.75) 122.87,53.87 125.466,53.87 127.046,55.45 R66B.1
  Bottom Layer w0.254: v1(122.75,53.75) 122.919,53.75 127.458,49.211 147.761,49.211 148.457,49.907 153.337,49.907 CON50.A16
Data_5V_MCU7: CON50.C16 IC61.10 R67B.1 | length 35.3
  Top Layer w0.254: IC61.10 120.221,53.825 121.226,53.825 122.357,54.957 122.357,55.357 v1(122.5,55.5) 124.2,55.5 R67B.1
  Bottom Layer w0.254: v1(122.5,55.5) 122.669,55.5 128.554,49.615 147.593,49.615 149.248,51.27 CON50.C16
Data_MCU0: RS60D.2 U40.18 | length 34.2
  Top Layer w0.2: U40.18 73.994,33.381 74.869,33.381 v1(76.5,31.75) ; v1(94,35.25) 101.5,27.75 RS60D.2
  Bottom Layer w0.2: v1(76.5,31.75) 90.306,31.75 93.806,35.25 v1(94,35.25)
Data_MCU1: RS61D.2 U40.19 | length 33.4
  Top Layer w0.2: U40.19 80.7,33.8 v1(81.75,32.75) ; v1(95.25,36.75) 100.35,31.65 102.575,31.65 102.95,31.275 RS61D.2
  Bottom Layer w0.2: v1(81.75,32.75) 81.944,32.75 85.944,36.75 v1(95.25,36.75)
Data_MCU2: RS62D.2 U40.20 | length 32.8
  Top Layer w0.2: U40.20 79.912,34.2 80.646,34.934 v1(80.816,34.934) ; v1(95.25,39) 95.388,38.863 98.613,38.863 102.95,34.525 RS62D.2
  Bottom Layer w0.2: v1(80.816,34.934) 80.998,34.934 83.164,37.1 93.156,37.1 95.056,39 v1(95.25,39)
Data_MCU3: RS63D.2 U40.21 | length 33
  Top Layer w0.2: U40.21 79.35,34.6 v1(82.25,37.5) ; v1(95.25,41) 95.388,40.862 99.863,40.862 102.95,37.775 RS63D.2
  Bottom Layer w0.2: v1(82.25,37.5) 91.539,37.5 95.039,41 v1(95.25,41)
Data_MCU4: RS64D.2 U40.22 | length 32.8
  Top Layer w0.2: U40.22 78.6,35 v1(82.6,39) ; v1(95.25,42.75) 96.35,41.65 102.575,41.65 102.95,41.275 RS64D.2
  Bottom Layer w0.2: v1(82.6,39) 91.306,39 95.056,42.75 v1(95.25,42.75)
Data_MCU5: RS65D.2 U40.24 | length 32.6
  Top Layer w0.2: U40.24 75.801,35.8 78.401,38.4 v1(78.592,38.4) ; v1(95.25,44.5) RS65D.2
  Bottom Layer w0.2: v1(78.592,38.4) 78.592,38.47 84.621,44.5 v1(95.25,44.5)
Data_MCU6: RS66D.2 U40.25 | length 34.2
  Top Layer w0.2: U40.25 73.994,36.219 74.796,36.219 74.827,36.25 75.373,36.25 77.45,38.327 77.45,38.85 v1(79.1,40.5) ; v1(95.25,46.75) 95.444,46.75 96.695,48 RS66D.2
  Bottom Layer w0.2: v1(79.1,40.5) 79.298,40.5 85.548,46.75 v1(95.25,46.75)
Data_MCU7: RS67D.2 U40.26 | length 35.7
  Top Layer w0.2: U40.26 74.777,36.6 74.796,36.619 75.104,36.619 77.1,38.615 77.1,39.8 v1(79.8,42.5) ; v1(95.25,48.5) 95.444,48.5 98.195,51.25 RS67D.2
  Bottom Layer w0.2: v1(79.8,42.5) 79.994,42.5 85.994,48.5 v1(95.25,48.5)
Extern_Enable: U30.55 U40.28 | length 43.5
  Top Layer w0.2: U40.28 73.994,37.419 74.796,37.419 74.827,37.45 74.945,37.45 76.243,38.748 76.243,61.743 v1(77.8,63.3) ; v1(82.3,71.3) 82.3,69.46 84.11,67.65 84.423,67.65 84.454,67.619 85.256,67.619 U30.55
  Bottom Layer w0.2: v1(77.8,63.3) 77.937,63.438 77.937,66.937 v1(82.3,71.3)
FPM_0.DIP_SW_Address_Bit0: CON70.10 U30.5 | length 56.1
  Top Layer w0.2: U30.5 88.1,45.085 90.55,42.635 90.55,37.569 93.815,34.304 93.815,10.565 CON70.10
FPM_0.DIP_SW_Address_Bit1: CON70.9 U30.4 | length 52.8
  Top Layer w0.2: U30.4 87.7,44.99 90.2,42.49 90.2,37.424 92.75,34.874 CON70.9
FPM_0.DIP_SW_Address_Bit2: CON70.12 U30.3 | length 55.4
  Top Layer w0.2: U30.3 87.3,44.895 89.85,42.345 89.85,37.279 91.275,35.854 91.275,10.565 CON70.12
FPM_0.DIP_SW_Address_Bit3: CON70.11 U30.2 | length 51.9
  Top Layer w0.2: U30.2 86.9,44.8 89.5,42.2 89.5,14.259 90.224,12.147 90.224,12.068 CON70.11
FPM_0.DIP_SW_Address_Bit4: CON70.14 U30.1 | length 54.6
  Top Layer w0.2: U30.1 86.5,44.705 88.735,42.47 88.735,10.565 CON70.14
FPM_0.DIP_SW_Address_Bit5: CON70.13 U30.64 | length 53.5
  Top Layer w0.2: U30.64 85.275,45.435 88.367,42.343 88.367,12.849 87.67,12.152 CON70.13
FPM_0.DIP_SW_Address_Bit6: CON70.16 U30.63 | length 58.7
  Top Layer w0.2: CON70.16 86.605,10.975 86.605,26.06 88.017,27.472 88.017,42.198 84.15,46.065 84.15,64.145 84.386,64.381 85.256,64.381 U30.63
FPM_0.DIP_SW_Address_Bit7: CON70.15 U30.62 | length 54.5
  Top Layer w0.2: CON70.15 85.15,12.06 85.15,44.57 83.8,45.92 83.8,64.29 84.291,64.781 85.256,64.781 U30.62
FPM_0.Extern_SW: CON70.17 U30.61 | length 56.1
  Top Layer w0.2: CON70.17 82.59,27.308 84.8,29.518 84.8,44.425 83.298,45.928 83.298,64.283 84.196,65.181 85.256,65.181 U30.61
FPM_0.RGB_LED_B: CON70.23 U30.58 | length 60.7
  Top Layer w0.2: CON70.23 74.97,21.344 83.75,30.124 83.75,43.99 82.248,45.493 82.248,64.717 83.93,66.4 U30.58
FPM_0.RGB_LED_G: CON70.21 U30.59 | length 59.2
  Top Layer w0.2: CON70.21 77.51,23.389 84.1,29.979 84.1,44.135 82.598,45.638 82.598,64.572 84.025,66 U30.59
FPM_0.RGB_LED_R: CON70.19 U30.60 | length 57.6
  Top Layer w0.2: CON70.19 80.05,25.434 84.45,29.834 84.45,44.28 82.948,45.783 82.948,64.428 84.07,65.55 84.423,65.55 84.454,65.581 85.256,65.581 U30.60
FPM_1.Global_Reset: CON70.26 U30.56 U40.27 | length 80.7
  Top Layer w0.2: CON70.26 72.43,9.684 73.905,11.159 73.905,20.774 83.4,30.269 83.4,40.641 78.591,45.45 77.95,45.45 ; U40.27 73.994,37.019 75.009,37.019 76.593,38.603 76.593,44.093 77.95,45.45 ; v1(78.6,61.6) 77.95,60.95 77.95,45.45 ; v1(82.5,67.5) 82.716,67.5 83.016,67.2 U30.56
  Bottom Layer w0.2: v1(78.6,61.6) 78.86,61.86 78.86,63.86 v1(82.5,67.5)
FPM_1.SEG_A: CON70.28 U40.13 | length 23
  Top Layer w0.2: CON70.28 69.89,9.808 71.365,11.283 71.365,21.052 71.55,21.237 U40.13
FPM_1.SEG_B: CON70.27 U40.12 | length 20.3
  Top Layer w0.2: CON70.27 69.89,20.752 71.15,22.012 U40.12
FPM_1.SEG_C: CON70.30 U40.11 | length 23.7
  Top Layer w0.2: CON70.30 67.35,9.77 68.825,11.245 68.825,20.182 70.75,22.107 U40.11
FPM_1.SEG_D: CON70.29 U40.10 | length 21
  Top Layer w0.2: CON70.29 67.35,20.297 70.35,23.297 U40.10
FPM_1.SEG_DP: CON70.33 U40.4 | length 22.1
  Top Layer w0.2: CON70.33 62.27,23.996 67.95,29.676 U40.4
FPM_1.SEG_E: CON70.32 U40.9 | length 24.4
  Top Layer w0.2: CON70.32 66.285,10.975 66.285,19.727 69.95,23.392 U40.9
FPM_1.SEG_F: CON70.31 U40.7 | length 21.1
  Top Layer w0.2: CON70.31 64.81,22.968 69.15,27.308 U40.7@69.15,31.39
FPM_1.SEG_G: CON70.34 U40.5 | length 24.8
  Top Layer w0.2: CON70.34 62.27,9.684 63.745,11.159 63.745,24.976 68.35,29.581 U40.5
FPM_1.Select_0: CON70.36 U40.3 | length 25.5
  Top Layer w0.2: CON70.36 59.73,9.847 61.205,11.322 61.205,23.426 67.55,29.771 U40.3
FPM_1.Select_1: CON70.35 U40.2 | length 22.8
  Top Layer w0.2: CON70.35 59.73,23.02 67.15,30.44 U40.2
FPM_1.Select_2: CON70.38 U40.1 | length 26.7
  Top Layer w0.2: CON70.38 58.665,10.975 58.665,24.265 66.3,31.9 66.704,31.9 66.704,31.821 U40.1
FPM_1.Select_3: CON70.37 U40.64 | length 24.8
  Top Layer w0.2: CON70.37 57.19,23.285 64.85,30.945 64.85,32.954 64.896,33 U40.64
GND: C60.2 C61.2 C62.2 C63.2 CC30.1 CC31.1 CC32.1 CC33.1 CC34.1 CC35.1 CC40.1 CC41.1 CC42.1 CC43.1 CC44.1 CC45.1 CE50.2 CE51.2 CON50.A12 CON50.A17 CON50.A31 CON50.A32 CON50.C12 CON50.C17 CON50.C31 CON50.C32 CON53.1 CON70.40 DS50.2 DS51.2 G0.2 G1.2 G2.2 IC60.11 IC60.12 IC60.13 IC60.22 IC61.11 IC61.12 IC61.13 IC61.22 P20.2 P20.10 R0.2 R1.2 R2.2 U30.65 U31.2 U40.65 U41.2 Y0.2 Y1.2 Y2.2 Y80.2 | length 6.2
  Bottom Layer w1: v1(144,48) 144.3,47.7 148.59,47.7 CON50.C17
  other v2: 67.95,34.2 69.15,34.2 70.35,34.2 71.55,34.2 67.95,35.4 69.15,35.4 70.35,35.4 71.55,35.4 67.95,36.6 69.15,36.6 70.35,36.6 71.55,36.6 67.95,37.8 69.15,37.8 70.35,37.8 71.55,37.8 87.7,65.2 88.9,65.2 90.1,65.2 91.3,65.2 87.7,66.4 88.9,66.4 90.1,66.4 91.3,66.4 87.7,67.6 88.9,67.6 90.1,67.6 91.3,67.6 87.7,68.8 88.9,68.8 90.1,68.8 91.3,68.8
LS_Address_MCU0: IC60.21 RS60C.1 | length 18.3
  Top Layer w0.254: RS60C.1 104.3,62.132 109.174,67.006 109.174,71.374 113.699,75.9 114.279,75.9 IC60.21
LS_Address_MCU1: IC60.20 RS61C.1 | length 16.2
  Top Layer w0.254: RS61C.1 104.3,65.346 108.77,69.816 108.77,72.35 113.02,76.6 IC60.20
LS_Address_MCU2: IC60.19 RS62C.1 | length 14.2
  Top Layer w0.254: RS62C.1 104.3,69.521 112.029,77.25 IC60.19
LS_Address_MCU3: IC60.18 RS63C.1 | length 12.6
  Top Layer w0.254: RS63C.1 104.3,71.775 110.425,77.9 IC60.18
LS_Address_MCU4: IC60.17 RS64C.1 | length 11.5
  Top Layer w0.254: RS64C.1 104.3,74.989 107.861,78.55 IC60.17
LS_Address_MCU5: IC60.16 RS65C.1 | length 10.5
  Top Layer w0.254: RS65C.1 106.918,78.179 107.939,79.2 IC60.16
LS_Address_MCU6: IC60.15 RS66C.1 | length 10.7
  Top Layer w0.254: RS66C.1 104.3,81.368 105.818,79.85 IC60.15
LS_Address_MCU7: IC60.14 RS67C.1 | length 11.7
  Top Layer w0.254: RS67C.1 104.3,84.582 108.382,80.5 IC60.14
LS_Data_MCU0: IC61.21 RS60D.1 | length 26.5
  Top Layer w0.254: RS60D.1 104.55,27.775 109.767,32.992 109.767,45.892 113.699,49.825 114.279,49.825 IC61.21
LS_Data_MCU1: IC61.20 RS61D.1 | length 23.9
  Top Layer w0.254: RS61D.1 104.55,31.275 109.363,36.088 109.363,46.574 113.264,50.475 114.279,50.475 IC61.20
LS_Data_MCU2: IC61.19 RS62D.1 | length 21.4
  Top Layer w0.254: RS62D.1 104.55,34.525 108.959,38.934 108.959,46.943 113.191,51.175 IC61.19
LS_Data_MCU3: IC61.18 RS63D.1 | length 18.9
  Top Layer w0.254: RS63D.1 104.55,39.954 108.555,43.959 108.555,47.36 113.02,51.825 IC61.18
LS_Data_MCU4: IC61.17 RS64D.1 | length 16
  Top Layer w0.254: RS64D.1 104.55,43.204 108.151,46.805 108.151,47.606 113.02,52.475 IC61.17
LS_Data_MCU5: IC61.16 RS65D.1 | length 14
  Top Layer w0.254: RS65D.1 104.55,45.578 112.097,53.125 IC61.16
LS_Data_MCU6: IC61.15 RS66D.1 | length 12.2
  Top Layer w0.254: RS66D.1 104.55,48.025 110.3,53.775 IC61.15
LS_Data_MCU7: IC61.14 RS67D.1 | length 11.1
  Top Layer w0.254: RS67D.1 104.55,51.275 107.7,54.425 IC61.14
NetCC34_2: CC34.2 U31.4 | length 4.2
  Top Layer w0.254: CC34.2 79.3,74.025 81.45,76.175 U31.4
NetCC44_2: CC44.2 U41.4 | length 4.2
  Top Layer w0.254: CC44.2 59.55,43.025 61.7,45.175 U41.4
NetDS50_1: DS50.1 RS50.1 | length 4.8
  Top Layer w0.254: DS50.1 RS50.1
NetDS51_1: DS51.1 RS51.1 | length 4.8
  Top Layer w0.254: DS51.1 RS51.1
NetG0_1: G0.1 RS_G0.1 | length 10.8
  Top Layer w0.254: G0.1 42.563,77.062 RS_G0.1
NetG1_1: G1.1 RS_G1.1 | length 16.1
  Top Layer w0.254: G1.1 42.281,80.656 RS_G1.1
NetG2_1: G2.1 RS_G2.1 | length 21.5
  Top Layer w0.254: G2.1 42,84.25 RS_G2.1
NetR0_1: R0.1 RS_R0.1 | length 11
  Top Layer w0.254: R0.1 42.525,60.25 47.25,55.525 RS_R0.1
NetR1_1: R1.1 RS_R1.1 | length 14.3
  Top Layer w0.254: R1.1 35.525,61.4 44.969,61.4 47.25,59.119 RS_R1.1
NetR2_1: R2.1 RS_R2.1 | length 17.8
  Top Layer w0.254: R2.1 32.938,62.687 RS_R2.1
NetRS_Y0_1: RS_Y0.1 Y0.1 | length 9.1
  Top Layer w0.254: Y0.1 38.469,66.281 RS_Y0.1
NetRS_Y1_1: RS_Y1.1 Y1.1 | length 14.3
  Top Layer w0.254: Y1.1 37.377,69.502 46.902,69.502 47.25,69.85 RS_Y1.1
NetRS_Y2_1: RS_Y2.1 Y2.1 | length 19.6
  Top Layer w0.254: Y2.1 31.3,66.5 35.1,70.3 39.017,70.3 42.185,73.469 RS_Y2.1
Peripherial_Signals.LED_G0: RS_G0.2 U40.32 | length 49
  Top Layer w0.2: RS_G0.2 49.783,77.062 74,52.846 74,39.046 73.975,39.021 U40.32
Peripherial_Signals.LED_G1: RS_G1.2 U40.31 | length 53.9
  Top Layer w0.2: RS_G1.2 48.85,78.491 75.1,52.241 75.1,38.855 74.864,38.619 73.994,38.619 U40.31
Peripherial_Signals.LED_G2: RS_G2.2 U40.30 | length 58.4
  Top Layer w0.2: RS_G2.2 48.85,84.225 75.45,57.625 75.45,38.45 75.2,38.2 U40.30
Peripherial_Signals.LED_R0: RS_R0.2 U40.43 | length 37.4
  Top Layer w0.2: RS_R0.2 49.05,55.3 62.95,55.3 v1(66.75,51.5) ; v1(62.5,43.8) 64.6,41.7 68.4,41.7 68.75,41.35 U40.43
  Bottom Layer w0.2: v1(62.5,43.8) 64.888,46.187 64.888,49.637 v1(66.75,51.5)
Peripherial_Signals.LED_R1: RS_R1.2 U40.38 | length 34.6
  Top Layer w0.2: RS_R1.2 60.288,59.094 70.75,48.631 U40.38
Peripherial_Signals.LED_R2: RS_R2.2 U40.37 | length 36.6
  Top Layer w0.2: RS_R2.2 48.85,62.662 49.225,62.287 57.589,62.287 71.15,48.726 U40.37
Peripherial_Signals.LED_Y0: RS_Y0.2 U40.36 | length 38.5
  Top Layer w0.2: RS_Y0.2 54.09,66.281 71.55,48.821 U40.36
Peripherial_Signals.LED_Y1: RS_Y1.2 U40.35 | length 40.5
  Top Layer w0.2: RS_Y1.2 50.991,69.875 71.95,48.916 U40.35
Peripherial_Signals.LED_Y2: RS_Y2.2 U40.34 | length 43.5
  Top Layer w0.2: RS_Y2.2 49.822,73.469 72.35,50.941 U40.34
TCK: CON70.2 P20.1 U30.16 U40.16 | length 139.9
  Top Layer w0.2: U40.16 72.783,31.742 72.783,30.967 76.197,27.553 76.647,27.553 v1(76.8,27.4) ; U30.16 92.5,62.746 92.546,62.7 99.2,62.7 v1(99.25,62.75) ; v1(95.9,30.3) 96.16,30.04 97.46,30.04 v1(101.5,26) 109.9,17.6 124.04,17.6 P20.1 128.8,11.44 127.816,11.44 127.416,11.04 104.45,11.04 CON70.2
  Bottom Layer w0.2: v1(76.8,27.4) 79.7,30.3 v1(95.9,30.3) ; v1(99.25,62.75) 101.5,60.5 v1(101.5,26)
TDI: CON70.1 P20.9 U30.15 | length 75.5
  Top Layer w0.2: U30.15 92.1,61.55 92.217,61.433 98.066,61.433 98.133,61.5 v1(98.5,61.5) ; CON70.1 103.01,12.14 P20.9
  Bottom Layer w0.254: v1(98.5,61.5) 98.623,61.377 98.623,27.708 102.91,23.42 CON70.1
TDO: CON70.4 P20.3 U40.17 | length 76
  Top Layer w0.2: U40.17 73.975,31.925 v1(75.5,30.4) ; CON70.4 99.305,10.565 99.305,12.481 100.414,13.59 125.286,13.59 126.736,12.14 P20.3
  Bottom Layer w0.2: v1(75.5,30.4) 73.45,28.35 73.45,24.669 79.544,18.575 92.801,18.575 98.895,12.481 98.895,10.975 CON70.4
TDO_Chained: U30.17 U40.15 | length 68.9
  Top Layer w0.2: U40.15 72.35,26.9 v1(74.25,25) ; U30.17@93.725,64.05 U30.17 96.081,64 96.581,63.5 v1(96.75,63.5)
  Bottom Layer w0.2: v1(74.25,25) 74.376,25.126 91.858,25.126 96.75,30.019 v1(96.75,63.5)
TMS: CON70.3 P20.5 U30.14 U40.14 | length 115.3
  Top Layer w0.2: U40.14 71.95,26.169 74.281,23.838 75.563,23.838 v1(75.7,23.7) ; U30.14 91.7,61.455 92.768,60.387 97.612,60.387 v1(97.75,60.25) ; CON70.3 101.57,13.24 123.096,13.24 124.196,12.14 P20.5
  Bottom Layer w0.2: v1(75.7,23.7) 77.35,22.05 97.75,22.05 ; v1(97.75,60.25) 97.75,22.05 ; CON70.3 100.24,12.17 100.24,19.56 97.75,22.05
VCC_INT_CPLD0: CC30.2 CC35.2 CON30.1 U30.8 U30.41 U31.5 | length 35.4
  Top Layer w0.2: U31.5 U31.5@81.535,79.2 ; U31.5@81.675,79.2 82.65,79.2 89.25,72.6 89.25,71.96 89.254,71.957 89.254,71.271 U30.41 89.319,71.206 89.319,70.336 89.821,69.834 91.866,69.834 92.3,69.4 92.3,64.7 91.904,64.304 89.683,64.304 89.319,63.94 89.319,62.794 U30.8 89.319,62.756 89.319,61.954 89.35,61.923 89.35,61.377 91.077,59.65 92.825,59.65 93.2,59.275 CC30.2
  Top Layer w0.254: U31.5@81.535,79.2 81.675,79.2 83.55,81.075 CC35.2
VCC_INT_CPLD1: CC40.2 CC45.2 CON40.1 U40.8 U40.41 U41.5 | length 50
  Top Layer w0.2: CC40.2 68.425,25.3 69.55,26.425 U40.8 69.569,31.794 69.569,32.664 70.071,33.166 72.266,33.166 72.5,33.4 72.5,38.4 72.066,38.834 70.071,38.834 69.569,39.336 69.569,40.598 U40.41@69.544,40.623
  Top Layer w0.254: U41.5 U41.5@61.925,48.2 ; CC45.2 63.8,50.075 U41.5@61.925,48.2 ; U40.41@69.519,41.077 69.519,42.312 63.8,48.031 v1(63.8,48.2) U41.5@61.925,48.2
  Bottom Layer w1: CON40.1 54.074,40.274 55.874,40.274 v1(63.8,48.2)
WRen: CON50.A19 U30.37 | length 123.1
  Top Layer w0.254: U30.37 90.9,73.985 92.88,75.965 92.88,78.13 v1(93,78.25)
  Bottom Layer w0.254: v1(93,78.25) 93.169,78.25 105.466,90.547 155.685,90.547 155.877,90.355 155.877,44.827 CON50.A19
pads on no net: CON50.34 CON50.35 CON50.A3 CON50.A18 CON50.A20 CON50.A21 CON50.A22 CON50.A23 CON50.A24 CON50.A25 CON50.A27 CON50.A28 CON50.A29 CON50.A30 CON50.C3 CON50.C18 CON50.C19 CON50.C20 CON50.C21 CON50.C22 CON50.C23 CON50.C24 CON50.C25 CON50.C27 CON50.C28 CON50.C29 CON50.C30 CON70.5 CON70.6 CON70.7 CON70.8 CON70.18 CON70.20 CON70.22 CON70.24 CON70.25 P20.6 P20.7 P20.8 PM1001.1 PM1002.1 PM1003.1 PM1004.1 U30.9 U30.10 U30.11 U30.12 U30.13 U30.27 U30.28 U30.29 U30.30 U30.31 U30.32 U30.33 U30.34 U30.35 U30.36 U30.38 U30.42 U30.43 U30.44 U30.45 U30.46 U30.47 U30.48 U30.49 U30.50 U30.51 U30.52 U30.53 U30.54 U40.29 U40.33 U40.42 U40.44 U40.45 U40.46 U40.47 U40.48 U40.49 U40.50 U40.51 U40.52 U40.53 U40.54 U40.55 U40.56 U40.58 U40.59 U40.60 U40.61 U40.62 U40.63

## Polygon pours and split planes (outlines as drawn)
3V3 on Top Layer "Top_3V3" (solid, pour order 52): 117.5,32.75 124.25,32.75 124.25,35.75 117.5,35.75 117.5,48.75 113.648,48.75 113.62,48.722 113.5,32.75 117.5,32.75
5V0 on Top Layer "Top_5V" (solid, pour order 53): 127.25,33 129.75,33 129.75,37.75 145.25,37.75 145.25,36 147.5,36 147.5,57.5 145.75,57.5 145.75,61.5 141.5,61.5 141.5,69.25 147.75,69.25 147.75,84.5 160,84.5 159.995,100 122.75,100 122.75,99.694 122.694,99.75 108.75,99.75 108.75,85 122.75,85 122.75,84.5 146.512,84.5 139.458,69.5 126.4,69.5 126.4,74.9 119.4,74.9 119.4,73.4 123,73.4 123,69.5 121.125,69.5 121.125,56.5 145.25,56.5 145.25,46.75 121.25,46.75 121.25,48.75 119.25,48.75 119.25,37.75 127.25,37.75
GND on Top Layer "Top_GND" (solid, pour order 54): 0,0 159.995,0 159.995,100 0,100
VCC_INT_CPLD0 on Top Layer "Top_VCC_INT_CPLD0" (solid, pour order 0): 83.3,86.5 83.3,81.4 94,81.4 94,86.5